# Altium PCB Si4703_Eval_v13.PcbDoc
Units mil, origin at the board's own origin, x right, y up, seen from the top; angles counter-clockwise.
Board outline 900 x 1250 mil, 2 copper layers (Top, Bottom); 38 components, 29 nets, 101 pads, 21 vias.
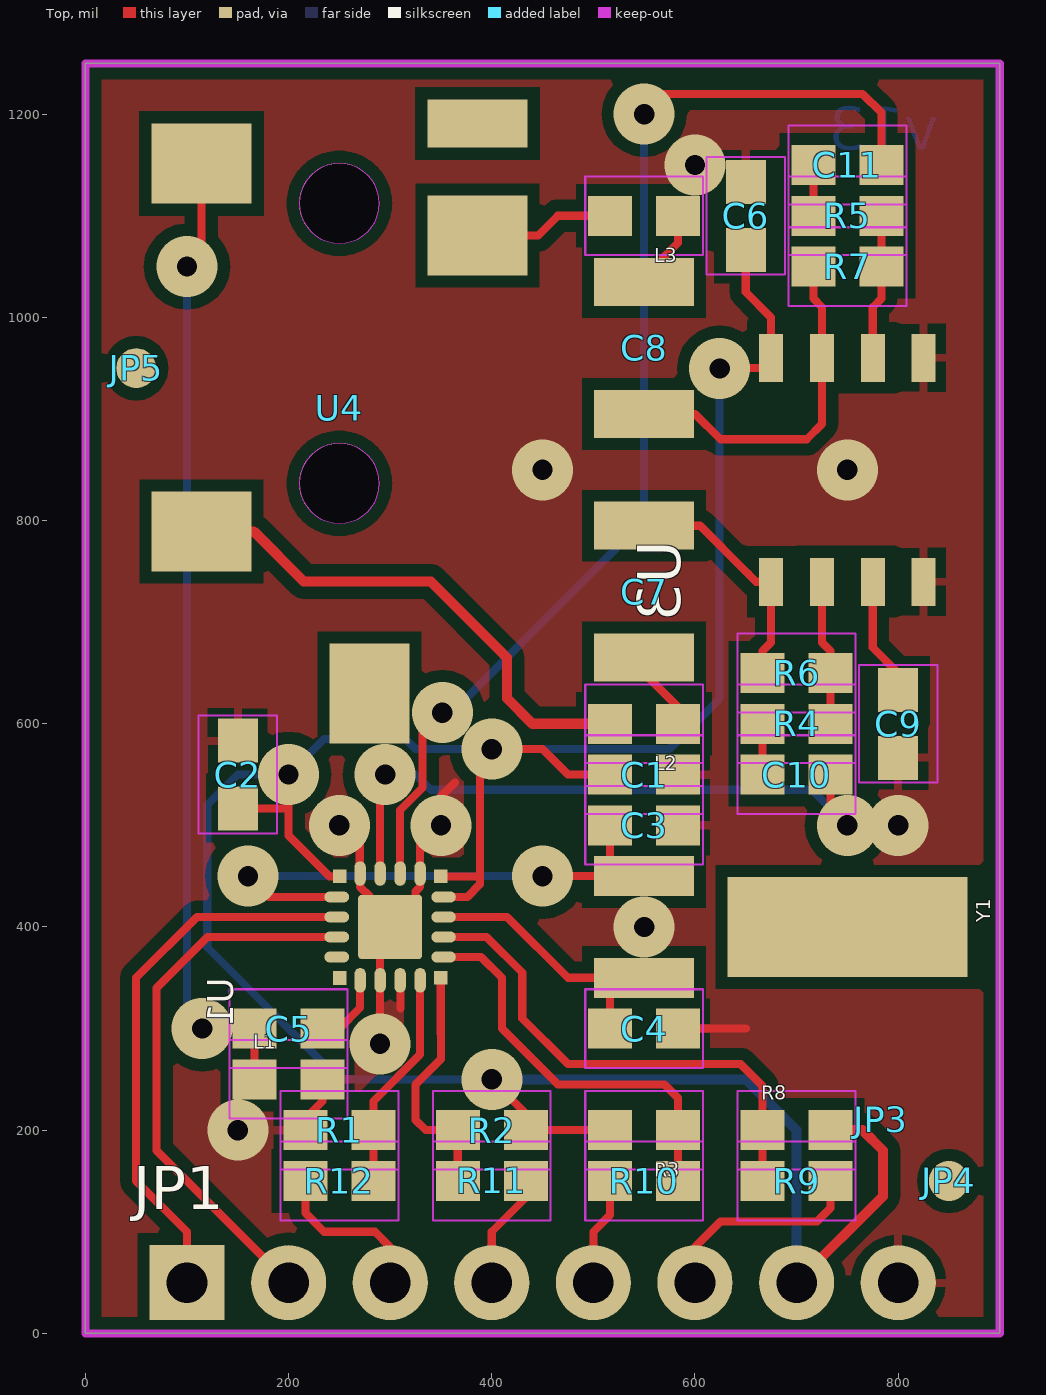
[diagram p0: Top view]
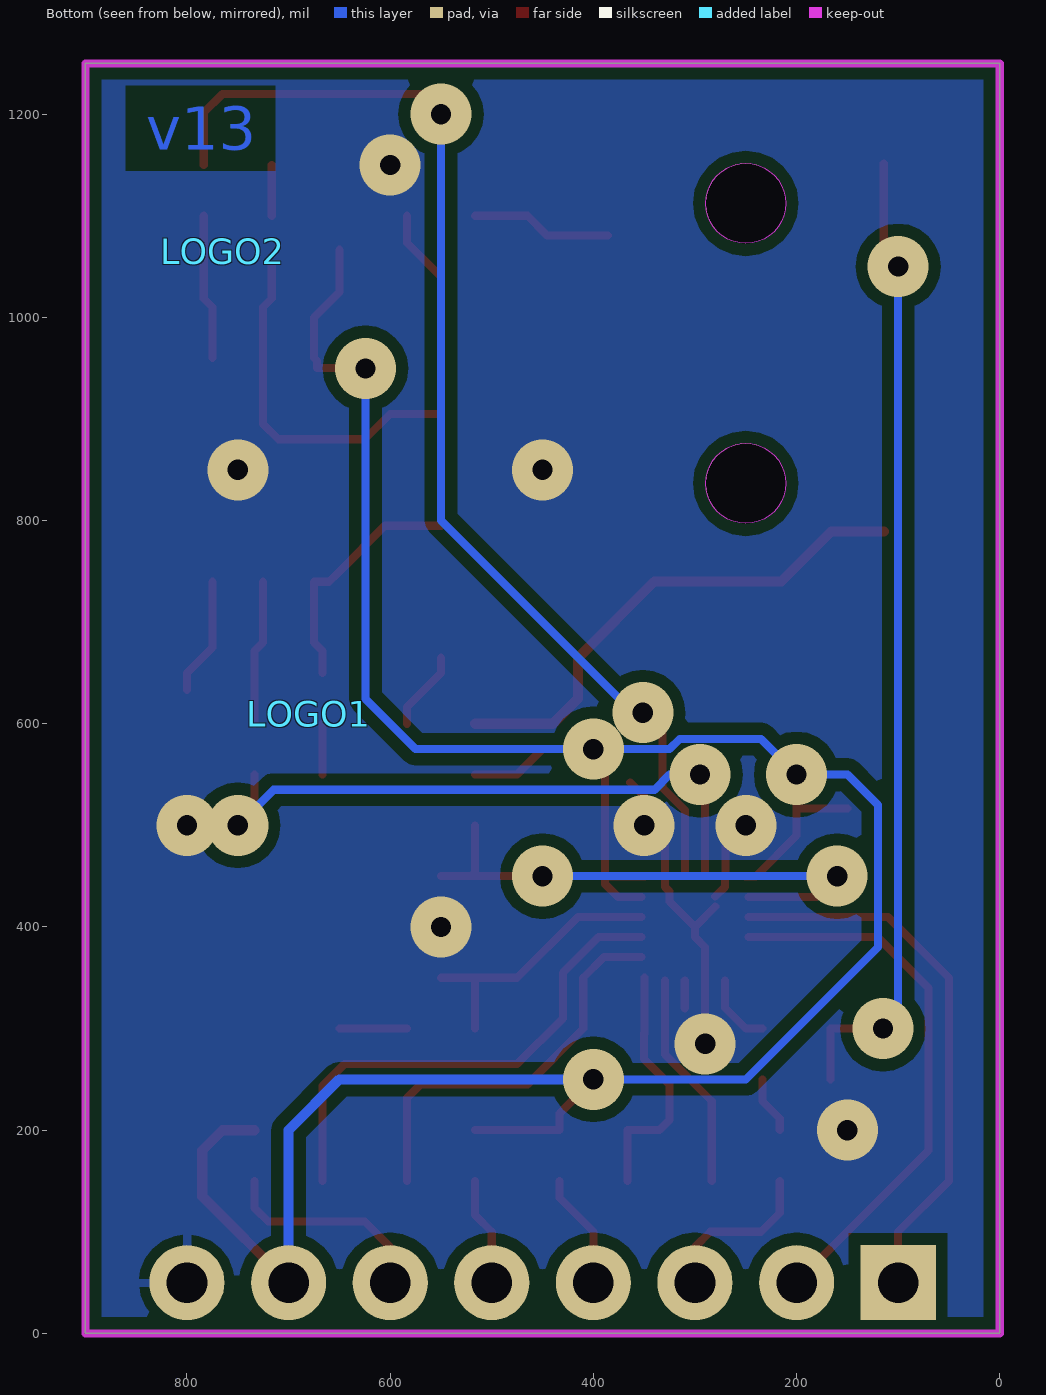
[diagram p1: Bottom view, seen from below]

## Layer stack, top to bottom
Top Solder: solder mask 0.4, Solder Resist, Dk 3.5
Top: signal copper 1.378
Dielectric 1: dielectric 12.6, FR-4, Dk 4.8
Bottom: signal copper 1.378
Bottom Solder: solder mask 0.4, Solder Resist, Dk 3.5

## Board outline
0,1250 0,0 900,0 900,1250
cut-out: 250,797.24 ccw(c250,836.61) 289.37,836.61 ccw(c250,836.61) 250,875.98 ccw(c250,836.61) 210.63,836.61 ccw(c250,836.61)
cut-out: 250,1072.83 ccw(c250,1112.2) 289.37,1112.2 ccw(c250,1112.2) 250,1151.57 ccw(c250,1112.2) 210.63,1112.2 ccw(c250,1112.2)

## Design rules (kind name [scope] priority, off if disabled: settings)
BoardOutlineClearance mdCopperDimension [All] p1: gap=10 ignorepadtopadclearanceinfootprint=FALSE except(0: Arc-SplitContinuation Track-SplitContinuation SMDPad-SplitContinuation THPad-SplitContinuation Via-SplitContinuation Fill-SplitContinuation Poly-SplitContinuation Region-SplitContinuation Text-SplitContinuation)
Clearance Clearance_for_PolygonClass_Isolate_12 [InPolygonClass('Isolate_12') vs IsArc Or IsTrack Or IsPad Or IsVia Or IsFill Or IsRegion Or IsText] p1: gap=12 ignorepadtopadclearanceinfootprint=FALSE
Clearance "Clearance (Same Net)" [All] p2: gap=8 ignorepadtopadclearanceinfootprint=FALSE
Clearance [All] p3: gap=8 ignorepadtopadclearanceinfootprint=FALSE
HoleSize [All] p1: absolutevalues=TRUE maxlimit=100000 minlimit=20 maxpercent=80.000 minpercent=20.000
HoleToHoleClearance mdDrill [All] p1: gap=8 allowstackedmicrovias=TRUE
MinimumSolderMaskSliver [All] p1 off: minsoldermaskwidth=10
PasteMaskExpansion Expansion_SMDPaste_OFF [InPadClass('SMDPaste_OFF')] p1: expansion=0
PasteMaskExpansion mlMinCreamFrame [All] p2: expansion=0
PolygonConnect PolygonConnect_For_PolygonThermal_ON_Width80000_Gap100000 [InPolygonClass('PolygonThermal_ON_Width80000_Gap100000') vs Not IsVia] p1: connectstyle=Relief reliefconductorwidth=8 reliefentries=4 polygonreliefangle="90 Angle" airgapwidth=10
PolygonConnect ThermalVias [IsVia] p2: connectstyle=Direct reliefconductorwidth=10 reliefentries=4 polygonreliefangle="90 Angle" airgapwidth=10
PolygonConnect [All] p3: connectstyle=Relief reliefconductorwidth=10 reliefentries=4 polygonreliefangle="90 Angle" airgapwidth=10
RoutingVias [All] p1: holewidth=20 width=60 viastyle="Through Hole" minholewidth=20 minwidth=60 maxholewidth=100 maxwidth=100
SolderMaskExpansion Expansion_SMDSolder_OFF [InPadClass('SMDSolder_OFF')] p1: expansion=0 istentingtop=FALSE
SolderMaskExpansion mlMinStopFrame [All] p2: expansion=4 istentingtop=FALSE
Width [All] p1: maxlimit=10000 minlimit=8 preferedwidth=8
26 further rules are at their usual default settings.

## Classes and differential pairs
polygon class PolygonThermal_ON_Width80000_Gap100000: Polygon_1_Net_GND Polygon_2_Net_GND
polygon class Isolate_12: Polygon_1_Net_GND Polygon_2_Net_GND
pad class SMDSolder_OFF: U1-21
pad class SMDPaste_OFF: JP4-1 JP5-1 U1-21

## Components (designator, comment, footprint, x,y, rotation, side; value= is the part's Value field where it differs from the comment)
C1 "0.1uF" 0603-CAP 550,550 r0 top
C2 "22nF" 0603-CAP 150,550 r90 top
C3 "22pF" 0603-CAP 550,500 r180 top
C4 "22pF" 0603-CAP 550,300 r180 top
C5 "1nF" 0603-CAP 200,300 r180 top
C6 "0.1uF" 0603-CAP 650,1100 r270 top
C7 "47uF" EIA3528 550,730 r90 top
C8 "47uF" EIA3528 550,970 r270 top
C9 "0.1uF" 0603-CAP 800,600 r270 top
C10 "1uF" 0603-CAP 700,550 r180 top
C11 "1uF" 0603-CAP 750,1150 r180 top
FRAME2 "" CREATIVE_COMMONS -500,-350 r0 top
JP1 "" 1X08 100,50 r0 top
JP3 "" SFE-LOGO-FLAME 783.1,210.8 r0 top
JP4 "" FIDUCIAL-1X2 850,150 r0 top
JP5 "" FIDUCIAL-1X2 50,950 r0 top
L1 "270nH" 0603 200,250 r0 top
L2 "Ferrite 2.5k" 0603 550,600 r180 top
L3 "Ferrite 2.5k" 0603 550,1100 r180 top
LOGO1 "" SFE_LOGO_NAME_FLAME_.1 680,610 r180 bottom
LOGO2 "" OSHW-LOGO-S 765,1065 r180 bottom
R1 "10k" 0603-RES 250,200 r180 top
R2 "10k" 0603-RES 400,200 r0 top
R3 "4.7k" 0603 550,200 r180 top
R4 "20k" 0603-RES 700,600 r180 top
R5 "20k" 0603-RES 750,1100 r180 top
R6 "20k" 0603-RES 700,650 r0 top
R7 "20k" 0603-RES 750,1050 r0 top
R8 "4.7k" 0603 700,200 r0 top
R9 "330" 0603-RES 700,150 r0 top
R10 "330" 0603-RES 550,150 r180 top
R11 "330" 0603-RES 400,150 r0 top
R12 "330" 0603-RES 250,150 r180 top
U1 "SI4703" SI470X 300,400 r90 top
U3 "TPA6111" SO08-TIGHT 750,850 r0 top
U4 "" AUDIO-JACK-3.5MM-SMD 250,1250 r270 top
U$1 "" REVISION -50,-450 r0 top
Y1 "32.768kHz" CRYSTAL-32KHZ-SMD 550,400 r270 top

## Footprints (in the part's own frame and the unit in brackets; to place one, negate y for a bottom-side part, rotate by r counter-clockwise, add the part's x,y. Pads: shape width x height; smd on the part's side, far side on the other; paste and mask are expansions set on the pad)
1X08 [mil] "1X08"
  rect 74x74 / inner round 68.37 / far side rect 74x74 hole 40: 1(0,0)
  round 74 hole 40: 2(100,0) 3(200,0) 4(300,0) 5(400,0) 6(500,0) 7(600,0) 8(700,0)
0603 [mm] "0603"
  rect 1.1x1 smd: 1(-0.85,0) 2(0.85,0)
  Top keep-out lines w0.051: -1.473,-0.983 -1.473,0.983 1.473,0.983 1.473,-0.983 -1.473,-0.983
0603-CAP [mm] "0603-CAP"
  rect 1.1x1 smd: 1(-0.85,0) 2(0.85,0)
  Top keep-out lines w0.051: -1.473,-0.983 -1.473,0.983 1.473,0.983 1.473,-0.983 -1.473,-0.983
0603-RES [mm] "0603-RES"
  rect 1.1x1 smd: 1(-0.85,0) 2(0.85,0)
  Top keep-out lines w0.051: 1.473,0.983 1.473,-0.983 -1.473,-0.983 -1.473,0.983 1.473,0.983
AUDIO-JACK-3.5MM-SMD [mm] "AUDIO-JACK-3.5MM-SMD"
  rect 2x2.5 smd: RING(4.3,3.45) SLEEVE(2.5,-3.45) TIP(11.7,-3.45)
  rect 1.2x2.5 smd: RSH(1.5,3.45)
  rect 2.5x2 smd: TSH(15.75,0.75)
CREATIVE_COMMONS [mil] "CREATIVE_COMMONS"
CRYSTAL-32KHZ-SMD [mm] "CRYSTAL-32KHZ-SMD"
  rect 2.5x6 smd: SHEILD(0,5.08)
  rect 1x2.5 smd: X1(-1.27,0) X2(1.27,0)
EIA3528 [mm] "EIA3528"
  rect 1.2x2.5 smd: A(1.65,0) C(-1.65,0)
FIDUCIAL-1X2 [mm] "FIDUCIAL-1X2"
  rrect100% 1x1 smd paste+0: 1(0,0)
OSHW-LOGO-S [mil] "OSHW-LOGO-S"
REVISION [mil] "REVISION"
SFE-LOGO-FLAME [mil] "SFE-LOGO-FLAME"
SFE_LOGO_NAME_FLAME_.1 [mil] "SFE_LOGO_NAME_FLAME_.1"
SI470X [mil] "SI470X"
  rect 13.39x13.39 smd: 1(-50.2,49.8) 6(-49.8,-49.8) 11(49.8,-49.8) 16(49.8,49.8)
  rrect95% 24.02x11.02 smd: 2(-52.56,29.53) 3(-52.56,9.84) 4(-52.56,-9.84) 5(-52.56,-29.53) 12(52.56,-29.53) 13(52.56,-9.84) 14(52.56,9.84) 15(52.56,29.53)
  rrect95% 11.02x24.02 smd: 7(-29.53,-52.56) 8(-9.84,-52.56) 9(9.84,-52.56) 10(29.53,-52.56) 17(29.53,52.56) 18(9.84,52.56) 19(-9.84,52.56) 20(-29.53,52.56)
  rrect10% 62.99x62.99 smd paste+0 mask+0: 21(0,0)
SO08-TIGHT [mil] "SO08-TIGHT"
  rect 23.62x47.24 smd: 1(-75,-110.24) 2(-25,-110.24) 3(25,-110.24) 4(75,-110.24) 5(75,110.24) 6(25,110.24) 7(-25,110.24) 8(-75,110.24)

## Part data
C1 C2 C3 C4 C5 C6 C9 C10 C11: library part 0603-CAP, PackageName=0603-CAP
C7 C8: library part EIA3528, PackageName=EIA3528
FRAME2: library part CREATIVE_COMMONS, PackageName=CREATIVE_COMMONS
JP1: library part 1X08, PackageName=1X08
JP3: library part SFE-LOGO-FLAME, PackageName=SFE-LOGO-FLAME
JP4 JP5: library part FIDUCIAL-1X2, PackageName=FIDUCIAL-1X2
L1 L2 L3 R3 R8: library part 0603, PackageName=0603
LOGO1: library part SFE_LOGO_NAME_FLAME_.1, PackageName=SFE_LOGO_NAME_FLAME_.1
LOGO2: library part OSHW-LOGO-S, PackageName=OSHW-LOGO-S
R1 R2 R4 R5 R6 R7 R9 R10 R11 R12: library part 0603-RES, PackageName=0603-RES
U1: library part SI470X, PackageName=SI470X
U3: library part SO08-TIGHT, PackageName=SO08-TIGHT
U4: library part AUDIO-JACK-3.5MM-SMD, PackageName=AUDIO-JACK-3.5MM-SMD
U$1: library part REVISION, PackageName=REVISION
Y1: library part CRYSTAL-32KHZ-SMD, PackageName=CRYSTAL-32KHZ-SMD

## Free pads (board coordinates)
  round 78.74 hole 78.74 unplated: MH1(250,1112.2) MH2(250,836.61)

## Via types
v1: diameter 60/60 (per signal layer), hole 20, Top to Bottom, 21 vias

## Nets (pads, with @x,y where several pads share a name; then routed paths per layer and width w, separated by ;. In a path a pad name is that pad's centre, name@x,y a point inside that pad or via, vN(x,y) a via of type N, cw(c..) or ccw(c..) an arc to the next point about the centre after c; other vN are vias at no path point)
3.3V: C1.1 C2.1 C6.2 JP1.7 R2.2 R3.2 R8.2 U1.10 U1.11 U1.16 U3.8 | length 2895.9
  Top w8: C2.1 198.46,516.54 200,515 ; v1(200,550) 200,515 ; U1.16@250,450 U1.16 240.2,449.8 200,490 200,515 ; U1.11 388.3,449.8 388.5,450 ; U1.10 375.93,429.53 388.5,442.1 388.5,450 ; v1(400,250) 433.46,216.54 R2.2 R3.2 ; C1.1 475,550 450,575 v1(400,575) 388.5,563.5 388.5,450 ; v1(624.3,949.7) 624.6,950 672,950 672,957.24 U3.8 675,1000 650,1025 C6.2
  Top w10: JP1.7 785,135 785,180 765,200 R8.2
  Bottom w8: v1(400,250) 250,250 120,380 120,520 150,550 v1(200,550) 235,585 315,585 325,575 v1(400,575) 575,575 624.3,624.3 v1(624.3,949.7)
  Bottom w10: v1(400,250) 650,250 700,200 JP1.7
!RST: JP1.3 R12.2 | length 163.9
  Top w8: R12.2 216.54,118.46 235,100 285,100 300,85 JP1.3
!RST-L: R1.1 R12.1 U1.5 | length 216.5
  Top w8: R12.1 R1.1 283.46,228.46 329.53,274.53 U1.5
!SEN: JP1.4 R11.2 | length 113.9
  Top w8: JP1.4 400,100 433.46,133.46 R11.2
!SEN-L: R2.1 R11.1 U1.6 | length 246.3
  Top w8: U1.6 349.8,295.2 350,295 350,270 325,245 325,210 335,200 R2.1 R11.1
ANT: C5.1 U1.2 | length 72.5
  Top w8: C5.1 250,300 270.47,320.47 U1.2
GND: C1.2 C2.2 C3.1 C4.1 C6.1 C9.2 JP1.8 L1.2 R1.2 U1.3 U1.4 U1.12 U1.15 U1.21 U3.4 U3.5 | length 524.7
  Top w8: R1.2 216.54,211.54 233.46,228.46 L1.2 ; v1(250,500) 270,480 270,450 270.47,450.47 U1.15 270.47,439.53 U1.21@280,430 ; U1.21@280,420 U1.21 ; 290,315 U1.3@290,347.6 ; U1.3 U1.3@290,347.6 ; U1.4 310,347.28 310,320 ; 363.7,542.1 329.53,507.93 U1.12 329.53,439.53 325,435 325,425 U1.21 ; C4.1 650,300 ; U1.3@290,347.6 290,380 300,390 U1.21
  other v1: 150,200 290,285 550,400 350,500 800,500 450,850 750,850 600,1150
GPIO1: JP1.2 U1.19 | length 542.1
  Top w8: JP1.2 70,180 70,340 120.16,390.16 U1.19
GPIO2: JP1.1 U1.18 | length 542.9
  Top w8: JP1.1 100,100 50,150 50,350 109.84,409.84 U1.18
LA: L2.2 U4.TIP | length 504.2
  Top w10: U4.TIP 165.63,789.37 215,740 340,740 415,665 415,625 440,600 L2.2
LOUT: C10.1 U1.14 | length 646.1
  Top w8: U1.14 290.16,545.16 v1(295,550) ; C10.1 733.46,516.54 v1(750,500)
  Bottom w8: v1(295,550) 325,550 340,535 715,535 v1(750,500) v1@740,510
N$1: C4.2 U1.9 Y1.X2 | length 273.7
  Top w8: U1.9 415.16,409.84 475,350 Y1.X2@520,350 ; C4.2 516.54,346.54 Y1.X2@520,350 ; Y1.X2 Y1.X2@520,350
N$2: C3.2 U1.17 Y1.X1 | length 537.4
  Top w8: v1(160,450) 180.47,429.53 U1.17 ; v1(450,450) Y1.X1@520,450 ; C3.2 516.54,453.46 Y1.X1@520,450 ; Y1.X1 Y1.X1@520,450
  Bottom w8: v1(160,450) v1(450,450)
N$3: C5.2 L1.1 U4.SLEEVE | length 965.2
  Top w8: v1(100,1050) 114.17,1064.17 U4.SLEEVE ; v1(115,300) C5.2 L1.1
  Bottom w8: v1(100,1050) 100,315 v1(115,300)
N$4: C7.C L2.1 | length 78.9
  Top w8: C7.C 550,650 583.46,616.54 L2.1
N$5: C7.A R6.1 U3.1 | length 241.1
  Top w8: C7.A 605.04,794.96 650,750 652.4,747.6 660.24,739.76 U3.1 675,680 666.54,671.54 R6.1
N$6: C8.A R7.1 U3.7 | length 350.1
  Top w8: C8.A 599.96,905.04 625,880 710,880 725,895 U3.7 725,1010 716.54,1018.46 R7.1
N$7: C8.C L3.1 | length 78.9
  Top w8: C8.C 550,1040 583.46,1073.46 L3.1
N$8: C9.1 U3.3 | length 116.7
  Top w8: U3.3 775,675 800,650 C9.1
N$11: R4.1 R6.2 U3.2 | length 143.3
  Top w8: U3.2 725,680 733.46,671.54 R6.2 R4.1
N$12: R5.1 R7.2 U3.6 | length 143.3
  Top w8: U3.6 775,1010 783.46,1018.46 R7.2 R5.1
N$13: C10.2 R4.2 | length 50
  Top w8: C10.2 R4.2
N$14: C11.2 R5.2 | length 50
  Top w8: R5.2 C11.2
RA: L3.2 U4.RING | length 138.7
  Top w8: U4.RING 445.71,1080.71 465,1100 L3.2
ROUT: C11.1 U1.13 | length 1153.5
  Top w8: U1.13 309.84,514.84 332,537 332,591.6 v1(351.3,610.9) ; v1(550,1200) 570,1220 765,1220 783.46,1201.54 C11.1
  Bottom w8: v1(351.3,610.9) 360.9,610.9 550,800 v1(550,1200)
SCLK: JP1.5 R10.2 | length 106.9
  Top w8: JP1.5 500,100 516.54,116.54 R10.2
SCLK-L: R3.1 R10.1 U1.7 | length 399.3
  Top w8: U1.7 389.53,370.47 410,350 410,300 465,245 570,245 583.46,231.54 R3.1 R10.1
SDIO: JP1.6 R9.2 | length 210.9
  Top w8: JP1.6 600,85 625,110 720,110 733.46,123.46 R9.2
SDIO-L: R8.1 R9.1 U1.8 | length 494.6
  Top w8: U1.8 394.84,390.16 430,355 430,310 475,265 645,265 666.54,243.46 R8.1 R9.1
pads on no net: JP4.1 JP5.1 U1.1 U1.20 U4.RSH U4.TSH Y1.SHEILD

## Polygon pours and split planes (outlines as drawn)
GND on Bottom "Polygon_1_Net_GND" (solid, remove dead copper, pour order 1): -4,-4 -4,1254 904,1254 904,-4
GND on Top "Polygon_2_Net_GND" (solid, remove dead copper, pour order 0): -4,-4 -4,1254 904,1254 904,-4

## Keep-outs
Keep-Out Layer:
  the board outline again, w8

## Other copper
Bottom:
  text "v13" at 840,1165 h42.5

## Silkscreen, mask and mechanical layers (free items; w line width, h text height)
Dimension:
  the board outline again, w8
tDocu:
  text "N. Seidle" at 700,-350 h59.5
  text "Toni Klopfenstein" at 700,-450 h59.5
tPlace:
  text "Evaluation" at 100,255 h27.2 r90
  text "Si4703 FM Tuner" at 148,255 h27.2 r90
bPlace:
  text "GPIO2" at 75,105 h42.5 r270
  text "GPIO1" at 175,105 h42.5 r270
  text "!RST" at 275,105 h42.5 r270
  text "!SEN" at 375,105 h42.5 r270
  text "SCLK" at 475,105 h42.5 r270
  text "SDIO" at 575,105 h42.5 r270
  text "3.3V" at 675,105 h42.5 r270
  text "GND" at 775,105 h42.5 r270

## Text inside footprints (layer, text, board x,y; h text height)
FRAME2: tDocu "Designed by:" at -50,-350 h59.5; tDocu "http://creativecommons.org/licenses/by-sa/3.0" at -500,-250 h59.5; tDocu "Released under the Creative Commons Attribution Share-Alike 3.0 License" at -1300,-150 h59.5
U$1: tDocu "Revision By:" at -50,-450 h59.5